# Altium PCB Mixer_Loaded.PCBDOC (part 2 of 2)
Units mil, origin at the board's own origin, x right, y up, seen from the top; angles counter-clockwise.
Board outline 16350 x 11350 mil, 2 copper layers (Top Layer, Bottom Layer); 554 components, 386 nets, 1551 pads, 0 vias.
Unrouted connection lines stored in the file: 1047.
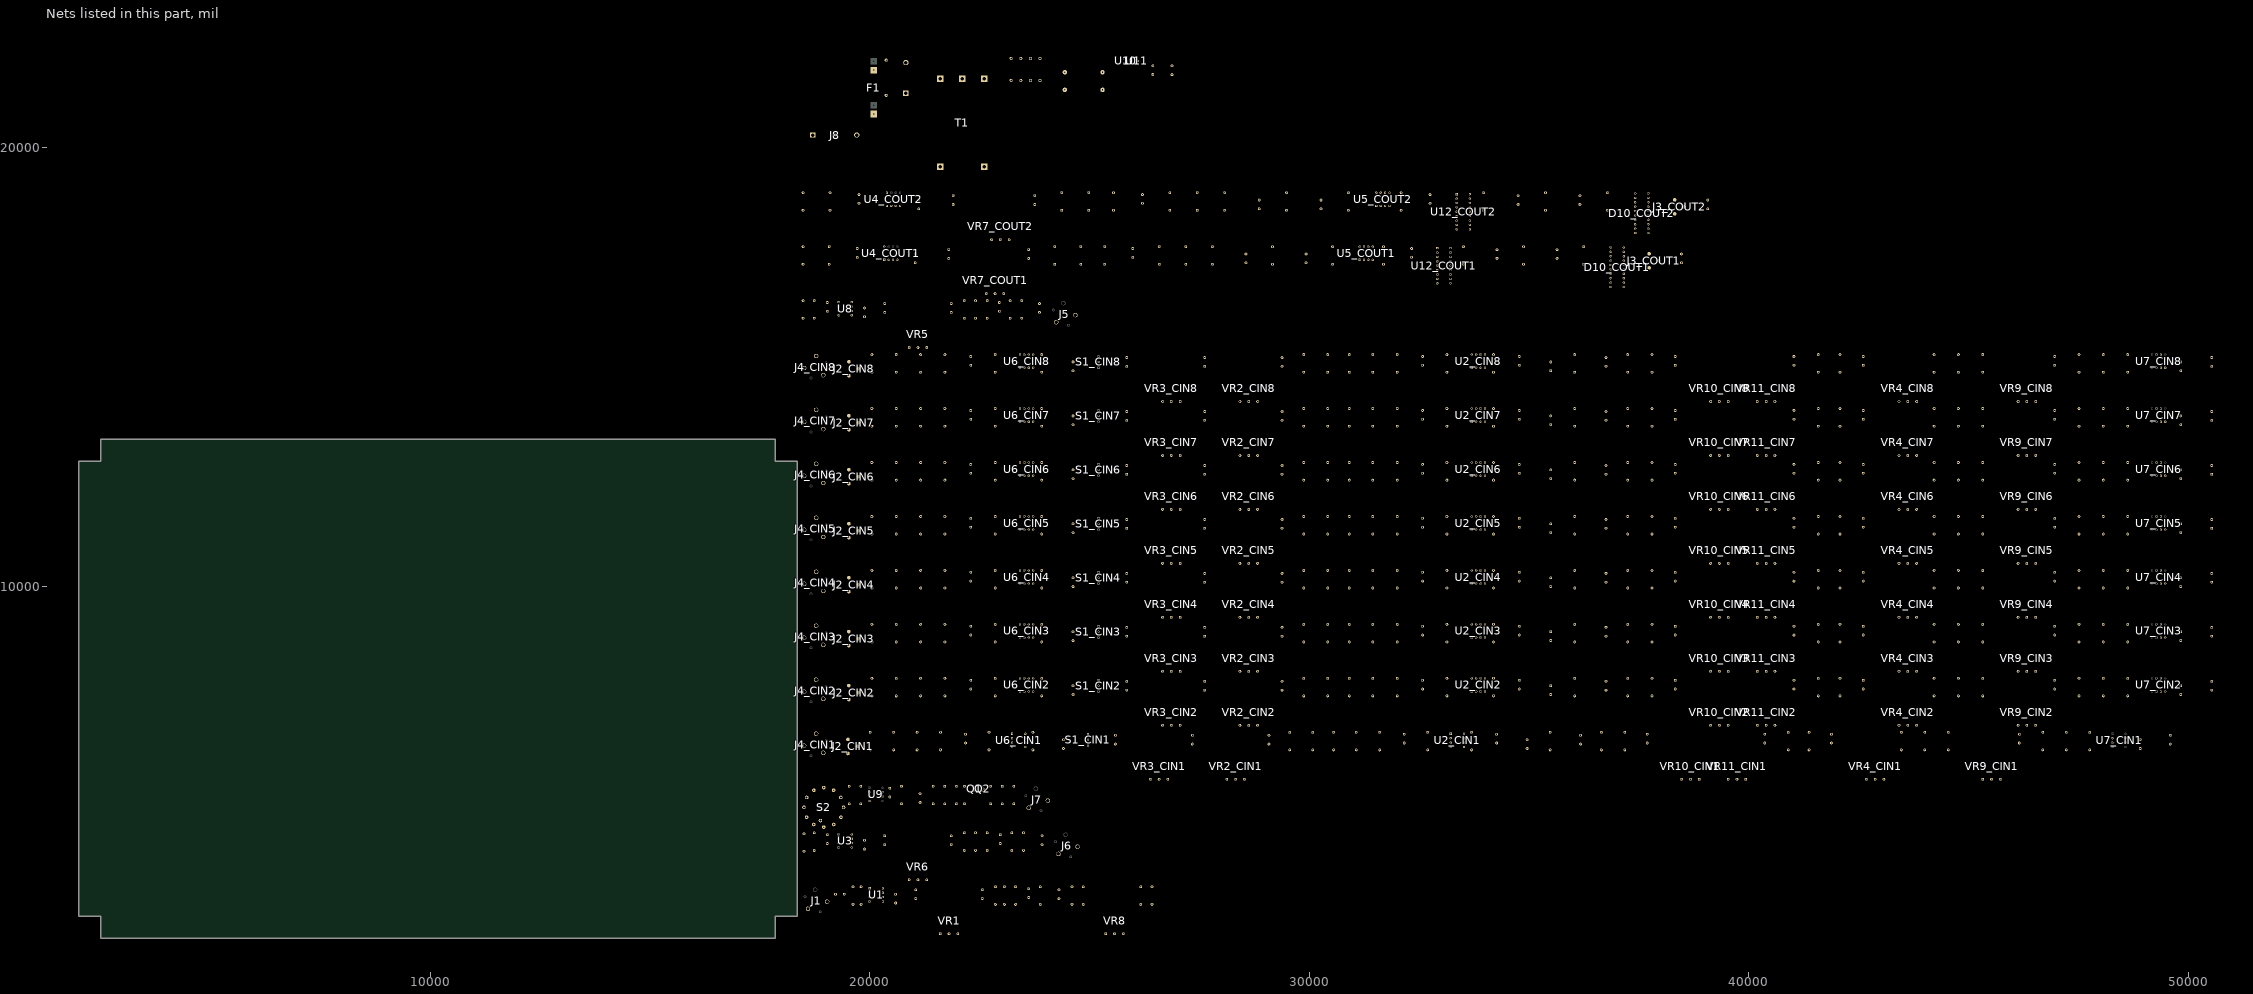
[diagram p2: the nets of this part, all layers, seen from the top]

## Footprints (in the part's own frame and the unit in brackets; to place one, negate y for a bottom-side part, rotate by r counter-clockwise, add the part's x,y. Pads: shape width x height; smd on the part's side, far side on the other; paste and mask are expansions set on the pad) (continued)
FUSE [mil]
  rect 150x150 hole 30: 1(0,0) 1(200,0) 2(1000,0) 2(1200,0)
  Top Layer region: 150,75 50,75 50,-75 150,-75
  Top Layer region: 1150,75 1050,75 1050,-75 1150,-75
  Bottom Layer region: 150,75 50,75 50,-75 150,-75
  Bottom Layer region: 1150,75 1050,75 1050,-75 1150,-75
  silkscreen extent -100,-100 1300,100
IEC-MAINS [mil]
  rect 120x120 hole 80: 1(0,0)
  round 120 hole 80: 2(500,0) 3(1000,0)
  silkscreen extent -250,-250 1250,1750
JACK-6.25MM [mil]
  round 60 hole 39: 0(-251,94) 0(94,-251)
  round 100 hole 78: 1(251,-22) 2(-22,251) 3(-184,-184)
  silkscreen extent -315,-315 315,315
"LED - 10 BAR HORIZONTAL" [mil]
  rect 50x50 hole 32: 1(0,0)
  round 50 hole 32: 2(300,0) 3(0,100) 4(300,100) 5(0,200) 6(300,200) 7(0,300) 8(300,300) 9(0,400) 10(300,400) 11(0,500) 12(300,500) 13(0,600) 14(300,600) 15(0,700) 16(300,700) 17(0,800) 18(300,800) 19(0,900) 20(300,900)
  silkscreen extent -50,-50 350,950
"POT - 24MM" [mil]
  round 62 hole 35: 1(-200,-600) 2(0,-600) 3(200,-600)
  round 50 hole 236.22 unplated: MNT(0,0)
  Keep-Out Layer circle w10: c0,0 r210
  silkscreen extent -500,-670 500,500
RAD0.2 [mil]
  round 62 hole 28: 1(0,0) 2(200,0)
  silkscreen extent -75,-75 275,75
RAD0.8 [mil]
  round 70 hole 40: 1(0,0) 2(800,0)
  silkscreen extent -75,-125 875,125
RB.2/.4 [mil]
  round 62 hole 28: 1(0,0) 2(-200,0)
  silkscreen extent -300,-200 200,200
RB.2/.4-NP [mil]
  round 62 hole 28: 1(0,0) 2(-200,0)
  silkscreen extent -300,-200 100,200
RB.4/.8 [mil]
  round 100 hole 28: 1(0,0) 2(-400,0)
  silkscreen extent -600,-400 350,400
SW-12WAY [mil]
  round 80 hole 40: 1(225,389.71) 2(389.71,225) 3(450,0) 4(389.71,-225) 5(225,-389.71) 6(0,-450) 7(-225,-389.71) 8(-389.71,-225) 9(-450,0) 10(-389.71,225) 11(-225,389.71) 12(0,450) 13(-75,-300)
  silkscreen extent -500,-500 500,500
SW-MAINS [mil]
  rect 120x120 hole 80: 1(0,0)
  round 120 hole 80: 2(700,0)
  silkscreen extent -120,-225 830,225
SW-SPDT [mil]
  rect 50x50 hole 32: 1(0,0)
  round 50 hole 32: 2(130,0) 3(260,0)
  silkscreen extent -70,-75 330,75
TO-92A [mil]
  round 50 hole 30: 1(0,0) 2(50,-50) 3(100,0)
  silkscreen extent -40,-90 140,40
TRANSFORMER [mil]
  rect 150x150 hole 80: 1(0,0) 2(0,1000) 3(2000,1000) 4(2000,500) 5(2000,0)
  silkscreen extent -500,-500 2500,1500
XLR-FEMALE [mm]
  round 2.032 smd: 1(-4.05,0.8) 2(4.05,0.8) 3(0,-4.7)
  silkscreen extent -9,-9 9,9
XLR-MALE [mm]
  round 2.032 smd: 1(4.05,0.8) 2(-4.05,0.8) 3(0,-4.7)
  silkscreen extent -9,-9 9,9

## Part data
C1 C2 C3 C4 C5 C6 C7_CIN1 C7_CIN2 C7_CIN3 C7_CIN4 C7_CIN5 C7_CIN6 C7_CIN7 C7_CIN8 C8_CIN1 C8_CIN2 C8_CIN3 C8_CIN4 C8_CIN5 C8_CIN6 C8_CIN7 C8_CIN8 C9_CIN1 C9_CIN2 C9_CIN3 C9_CIN4 C9_CIN5 C9_CIN6 C9_CIN7 C9_CIN8 C10_CIN1 C10_CIN2 C10_CIN3 C10_CIN4 C10_CIN5 C10_CIN6 C10_CIN7 C10_CIN8 C11 C12 C13_COUT1 C13_COUT2 C14_COUT1 C14_COUT2 C24 C25_CIN1 C25_CIN2 C25_CIN3 C25_CIN4 C25_CIN5 C25_CIN6 C25_CIN7 C25_CIN8 C26_CIN1 C26_CIN2 C26_CIN3 C26_CIN4 C26_CIN5 C26_CIN6 C26_CIN7 C26_CIN8 C27_CIN1 C27_CIN2 C27_CIN3 C27_CIN4 C27_CIN5 C27_CIN6 C27_CIN7 C27_CIN8 C28_COUT1 C28_COUT2 C29_CIN1 C29_CIN2 C29_CIN3 C29_CIN4 C29_CIN5 C29_CIN6 C29_CIN7 C29_CIN8 C30_CIN1 C30_CIN2 C30_CIN3 C30_CIN4 C30_CIN5 C30_CIN6 C30_CIN7 C30_CIN8 C31_CIN1 C31_CIN2 C31_CIN3 C31_CIN4 C31_CIN5 C31_CIN6 C31_CIN7 C31_CIN8 C32_CIN1 C32_CIN2 C32_CIN3 C32_CIN4 C32_CIN5 C32_CIN6 C32_CIN7 C32_CIN8 C33_CIN1 C33_CIN2 C33_CIN3 C33_CIN4 C33_CIN5 C33_CIN6 C33_CIN7 C33_CIN8 C34 C35 C36_COUT1 C36_COUT2 C37 C38 C39_COUT1 C39_COUT2 C40_COUT1 C40_COUT2 C41 C42 C43 C44 C51_COUT1 C51_COUT2: "Capacitor"
C15 C16_CIN1 C16_CIN2 C16_CIN3 C16_CIN4 C16_CIN5 C16_CIN6 C16_CIN7 C16_CIN8 C17_CIN1 C17_CIN2 C17_CIN3 C17_CIN4 C17_CIN5 C17_CIN6 C17_CIN7 C17_CIN8 C18_CIN1 C18_CIN2 C18_CIN3 C18_CIN4 C18_CIN5 C18_CIN6 C18_CIN7 C18_CIN8 C19 C20 C21 C22_COUT1 C22_COUT2 C23_COUT1 C23_COUT2 C45 C46 C47 C48 C49_COUT1 C49_COUT2 C50_COUT1 C50_COUT2: "Bi-Polar Capacitor"
D1 D2 D3 D4 D5 D6: "Diode"
F1: "Fuse"
J2_CIN1 J2_CIN2 J2_CIN3 J2_CIN4 J2_CIN5 J2_CIN6 J2_CIN7 J2_CIN8 J3_COUT1 J3_COUT2: "XLR connector, PCB mounted"
J8: "Connector"
Q1: "NPN BJT"
Q2: "PNP BJT"
R1 R2 R3_CIN1 R3_CIN2 R3_CIN3 R3_CIN4 R3_CIN5 R3_CIN6 R3_CIN7 R3_CIN8 R4_CIN1 R4_CIN2 R4_CIN3 R4_CIN4 R4_CIN5 R4_CIN6 R4_CIN7 R4_CIN8 R5_CIN1 R5_CIN2 R5_CIN3 R5_CIN4 R5_CIN5 R5_CIN6 R5_CIN7 R5_CIN8 R6_CIN1 R6_CIN2 R6_CIN3 R6_CIN4 R6_CIN5 R6_CIN6 R6_CIN7 R6_CIN8 R7 R8_COUT1 R8_COUT2 R9 R10 R11_CIN1 R11_CIN2 R11_CIN3 R11_CIN4 R11_CIN5 R11_CIN6 R11_CIN7 R11_CIN8 R12_CIN1 R12_CIN2 R12_CIN3 R12_CIN4 R12_CIN5 R12_CIN6 R12_CIN7 R12_CIN8 R13 R14 R15_COUT1 R15_COUT2 R16 R17 R18 R19 R20_CIN1 R20_CIN2 R20_CIN3 R20_CIN4 R20_CIN5 R20_CIN6 R20_CIN7 R20_CIN8 R21_CIN1 R21_CIN2 R21_CIN3 R21_CIN4 R21_CIN5 R21_CIN6 R21_CIN7 R21_CIN8 R22_CIN1 R22_CIN2 R22_CIN3 R22_CIN4 R22_CIN5 R22_CIN6 R22_CIN7 R22_CIN8 R23_CIN1 R23_CIN2 R23_CIN3 R23_CIN4 R23_CIN5 R23_CIN6 R23_CIN7 R23_CIN8 R24 R25_CIN1 R25_CIN2 R25_CIN3 R25_CIN4 R25_CIN5 R25_CIN6 R25_CIN7 R25_CIN8 R26_CIN1 R26_CIN2 R26_CIN3 R26_CIN4 R26_CIN5 R26_CIN6 R26_CIN7 R26_CIN8 R27_CIN1 R27_CIN2 R27_CIN3 R27_CIN4 R27_CIN5 R27_CIN6 R27_CIN7 R27_CIN8 R28_CIN1 R28_CIN2 R28_CIN3 R28_CIN4 R28_CIN5 R28_CIN6 R28_CIN7 R28_CIN8 R29 R30 R31 R32 R33 R34 R35 R36 R37_COUT1 R37_COUT2 R38_COUT1 R38_COUT2 R39 R40_CIN1 R40_CIN2 R40_CIN3 R40_CIN4 R40_CIN5 R40_CIN6 R40_CIN7 R40_CIN8 R41_CIN1 R41_CIN2 R41_CIN3 R41_CIN4 R41_CIN5 R41_CIN6 R41_CIN7 R41_CIN8 R42_COUT1 R42_COUT2 R43_CIN1 R43_CIN2 R43_CIN3 R43_CIN4 R43_CIN5 R43_CIN6 R43_CIN7 R43_CIN8 R44_COUT1 R44_COUT2 R45_CIN1 R45_CIN2 R45_CIN3 R45_CIN4 R45_CIN5 R45_CIN6 R45_CIN7 R45_CIN8 R46_CIN1 R46_CIN2 R46_CIN3 R46_CIN4 R46_CIN5 R46_CIN6 R46_CIN7 R46_CIN8 R47_CIN1 R47_CIN2 R47_CIN3 R47_CIN4 R47_CIN5 R47_CIN6 R47_CIN7 R47_CIN8 R48_CIN1 R48_CIN2 R48_CIN3 R48_CIN4 R48_CIN5 R48_CIN6 R48_CIN7 R48_CIN8 R49_CIN1 R49_CIN2 R49_CIN3 R49_CIN4 R49_CIN5 R49_CIN6 R49_CIN7 R49_CIN8 R50_CIN1 R50_CIN2 R50_CIN3 R50_CIN4 R50_CIN5 R50_CIN6 R50_CIN7 R50_CIN8 R51_CIN1 R51_CIN2 R51_CIN3 R51_CIN4 R51_CIN5 R51_CIN6 R51_CIN7 R51_CIN8 R52 R53 R54 R55_COUT1 R55_COUT2 R56_COUT1 R56_COUT2 R57 R58 R59 R60_COUT1 R60_COUT2 R61 R62 R63_COUT1 R63_COUT2 R64_COUT1 R64_COUT2 R65_COUT1 R65_COUT2 R66 R67 R68 R69_COUT1 R69_COUT2 R70_COUT1 R70_COUT2: "Resistor"
T1: "Center-Tapped Transformer"
U1 U2_CIN1 U2_CIN2 U2_CIN3 U2_CIN4 U2_CIN5 U2_CIN6 U2_CIN7 U2_CIN8 U3 U4_COUT1 U4_COUT2 U5_COUT1 U5_COUT2 U8: "Fast Settling Dual Operational Amplifier"
U6_CIN1 U6_CIN2 U6_CIN3 U6_CIN4 U6_CIN5 U6_CIN6 U6_CIN7 U6_CIN8: "Self-Contained Audio Preamplifier"
U7_CIN1 U7_CIN2 U7_CIN3 U7_CIN4 U7_CIN5 U7_CIN6 U7_CIN7 U7_CIN8: "Low Noise, High Speed Precision Operational Amplifier"
U9: "Low-Noise  JFET-Input Operational Amplifiers"
U10 U11: "Very Low Drop Voltage Regulators With Inhibit"
U12_COUT1 U12_COUT2: "Dot/Bar Display Driver"
VR1 VR2_CIN1 VR2_CIN2 VR2_CIN3 VR2_CIN4 VR2_CIN5 VR2_CIN6 VR2_CIN7 VR2_CIN8 VR3_CIN1 VR3_CIN2 VR3_CIN3 VR3_CIN4 VR3_CIN5 VR3_CIN6 VR3_CIN7 VR3_CIN8 VR4_CIN1 VR4_CIN2 VR4_CIN3 VR4_CIN4 VR4_CIN5 VR4_CIN6 VR4_CIN7 VR4_CIN8 VR5 VR6 VR7_COUT1 VR7_COUT2 VR8 VR9_CIN1 VR9_CIN2 VR9_CIN3 VR9_CIN4 VR9_CIN5 VR9_CIN6 VR9_CIN7 VR9_CIN8 VR10_CIN1 VR10_CIN2 VR10_CIN3 VR10_CIN4 VR10_CIN5 VR10_CIN6 VR10_CIN7 VR10_CIN8 VR11_CIN1 VR11_CIN2 VR11_CIN3 VR11_CIN4 VR11_CIN5 VR11_CIN6 VR11_CIN7 VR11_CIN8: "Potentiometer"

## Nets (pads, with @x,y where several pads share a name; then routed paths per layer and width w, separated by ;. In a path a pad name is that pad's centre, name@x,y a point inside that pad or via, vN(x,y) a via of type N, cw(c..) or ccw(c..) an arc to the next point about the centre after c; other vN are vias at no path point)
+15V: C15.1 C16_CIN1.1 C16_CIN2.1 C16_CIN3.1 C16_CIN4.1 C16_CIN5.1 C16_CIN6.1 C16_CIN7.1 C16_CIN8.1 C17_CIN1.1 C17_CIN2.1 C17_CIN3.1 C17_CIN4.1 C17_CIN5.1 C17_CIN6.1 C17_CIN7.1 C17_CIN8.1 C18_CIN1.1 C18_CIN2.1 C18_CIN3.1 C18_CIN4.1 C18_CIN5.1 C18_CIN6.1 C18_CIN7.1 C18_CIN8.1 C19.1 C20.1 C21.1 C22_COUT1.1 C22_COUT2.1 C23_COUT1.1 C23_COUT2.1 C47.1 C49_COUT1.1 C49_COUT2.1 Q1.1 R53.2 R69_COUT1.1 R69_COUT2.1 U1.4 U2_CIN1.8 U2_CIN2.8 U2_CIN3.8 U2_CIN4.8 U2_CIN5.8 U2_CIN6.8 U2_CIN7.8 U2_CIN8.8 U3.8 U4_COUT1.8 U4_COUT2.8 U5_COUT1.8 U5_COUT2.8 U6_CIN1.7 U6_CIN2.7 U6_CIN3.7 U6_CIN4.7 U6_CIN5.7 U6_CIN6.7 U6_CIN7.7 U6_CIN8.7 U7_CIN1.7 U7_CIN2.7 U7_CIN3.7 U7_CIN4.7 U7_CIN5.7 U7_CIN6.7 U7_CIN7.7 U7_CIN8.7 U8.8 U9.7 U10.3 U12_COUT1.3 U12_COUT1.9 U12_COUT2.3 U12_COUT2.9
-15V: C15.2 C16_CIN1.2 C16_CIN2.2 C16_CIN3.2 C16_CIN4.2 C16_CIN5.2 C16_CIN6.2 C16_CIN7.2 C16_CIN8.2 C17_CIN1.2 C17_CIN2.2 C17_CIN3.2 C17_CIN4.2 C17_CIN5.2 C17_CIN6.2 C17_CIN7.2 C17_CIN8.2 C18_CIN1.2 C18_CIN2.2 C18_CIN3.2 C18_CIN4.2 C18_CIN5.2 C18_CIN6.2 C18_CIN7.2 C18_CIN8.2 C19.2 C20.2 C21.2 C22_COUT1.2 C22_COUT2.2 C23_COUT1.2 C23_COUT2.2 C48.2 Q2.1 R54.1 U1.8 U2_CIN1.4 U2_CIN2.4 U2_CIN3.4 U2_CIN4.4 U2_CIN5.4 U2_CIN6.4 U2_CIN7.4 U2_CIN8.4 U3.4 U4_COUT1.4 U4_COUT2.4 U5_COUT1.4 U5_COUT2.4 U6_CIN1.4 U6_CIN2.4 U6_CIN3.4 U6_CIN4.4 U6_CIN5.4 U6_CIN6.4 U6_CIN7.4 U6_CIN8.4 U7_CIN1.4 U7_CIN2.4 U7_CIN3.4 U7_CIN4.4 U7_CIN5.4 U7_CIN6.4 U7_CIN7.4 U7_CIN8.4 U8.4 U9.4 U11.1
A_FUSE: C44.2 F1.2@20087,21753 S3.2
A_IN: F1.1@20087,20753 J8.1
A_SWITCH: C44.1 S3.1 T1.1
GND: C45.2 C46.1 C47.2 C48.1 C49_COUT1.2 C49_COUT2.2 C50_COUT1.2 C50_COUT2.2 J1.3 J2_CIN1.1 J2_CIN2.1 J2_CIN3.1 J2_CIN4.1 J2_CIN5.1 J2_CIN6.1 J2_CIN7.1 J2_CIN8.1 J3_COUT1.1 J3_COUT2.1 J4_CIN1.3 J4_CIN2.3 J4_CIN3.3 J4_CIN4.3 J4_CIN5.3 J4_CIN6.3 J4_CIN7.3 J4_CIN8.3 J5.3 J6.3 J7.3 R1.1 R2.1 R3_CIN1.2 R3_CIN2.2 R3_CIN3.2 R3_CIN4.2 R3_CIN5.2 R3_CIN6.2 R3_CIN7.2 R3_CIN8.2 R7.1 R8_COUT1.1 R8_COUT2.1 R24.2 R27_CIN1.1 R27_CIN2.1 R27_CIN3.1 R27_CIN4.1 R27_CIN5.1 R27_CIN6.1 R27_CIN7.1 R27_CIN8.1 R28_CIN1.1 R28_CIN2.1 R28_CIN3.1 R28_CIN4.1 R28_CIN5.1 R28_CIN6.1 R28_CIN7.1 R28_CIN8.1 R30.1 R31.2 R34.1 R35.2 R38_COUT1.2 R38_COUT2.2 R48_CIN1.1 R48_CIN2.1 R48_CIN3.1 R48_CIN4.1 R48_CIN5.1 R48_CIN6.1 R48_CIN7.1 R48_CIN8.1 R49_CIN1.1 R49_CIN2.1 R49_CIN3.1 R49_CIN4.1 R49_CIN5.1 R49_CIN6.1 R49_CIN7.1 R49_CIN8.1 R70_COUT1.1 R70_COUT2.1 T1.4 U3.3 U4_COUT1.3 U4_COUT2.3 U5_COUT1.3 U5_COUT2.3 U6_CIN1.5 U6_CIN2.5 U6_CIN3.5 U6_CIN4.5 U6_CIN5.5 U6_CIN6.5 U6_CIN7.5 U6_CIN8.5 U7_CIN1.3 U7_CIN2.3 U7_CIN3.3 U7_CIN4.3 U7_CIN5.3 U7_CIN6.3 U7_CIN7.3 U7_CIN8.3 U8.3 U10.2 U11.3 U12_COUT1.2 U12_COUT1.4 U12_COUT2.2 U12_COUT2.4 VR1.3 VR2_CIN1.3 VR2_CIN2.3 VR2_CIN3.3 VR2_CIN4.3 VR2_CIN5.3 VR2_CIN6.3 VR2_CIN7.3 VR2_CIN8.3 VR3_CIN1.3 VR3_CIN2.3 VR3_CIN3.3 VR3_CIN4.3 VR3_CIN5.3 VR3_CIN6.3 VR3_CIN7.3 VR3_CIN8.3 VR4_CIN1.3 VR4_CIN2.3 VR4_CIN3.3 VR4_CIN4.3 VR4_CIN5.3 VR4_CIN6.3 VR4_CIN7.3 VR4_CIN8.3 VR5.3 VR6.3 VR7_COUT1.3 VR7_COUT2.3 VR8.2 VR9_CIN1.2 VR9_CIN2.2 VR9_CIN3.2 VR9_CIN4.2 VR9_CIN5.2 VR9_CIN6.2 VR9_CIN7.2 VR9_CIN8.2
HEADPHONE1: R51_CIN1.2 S2.8
HEADPHONE2: R51_CIN2.2 S2.7
HEADPHONE3: R51_CIN3.2 S2.6
HEADPHONE4: R51_CIN4.2 S2.5
HEADPHONE5: R51_CIN5.2 S2.4
HEADPHONE6: R51_CIN6.2 S2.3
HEADPHONE7: R51_CIN7.2 S2.2
HEADPHONE8: R51_CIN8.2 S2.1
MB1: R17.2 R22_CIN1.2 R22_CIN2.2 R22_CIN3.2 R22_CIN4.2 R22_CIN5.2 R22_CIN6.2 R22_CIN7.2 R22_CIN8.2 R37_COUT1.1 S2.11
MB2: R19.2 R23_CIN1.2 R23_CIN2.2 R23_CIN3.2 R23_CIN4.2 R23_CIN5.2 R23_CIN6.2 R23_CIN7.2 R23_CIN8.2 R37_COUT2.1 S2.12
NetC1_1: C1.1 J1.1
NetC1_2: C1.2 R1.2 R9.1
NetC2_1: C2.1 VR1.2
NetC2_2: C2.2 R2.2 R10.1
NetC3_1: C3.1 VR5.2
NetC3_2: C3.2 R13.1
NetC4_1: C4.1 VR6.2
NetC4_2: C4.2 R14.1
NetC5_1: C5.1 U1.1 U1.2
NetC5_2: C5.2 VR1.1
NetC6_1: C6.1 C24.2 R39.1 U1.7
NetC6_2: C6.2 R16.1 R18.1
NetC7_CIN1_1: C7_CIN1.1 VR2_CIN1.2
NetC7_CIN1_2: C7_CIN1.2 R3_CIN1.1 R11_CIN1.1
NetC7_CIN2_1: C7_CIN2.1 VR2_CIN2.2
NetC7_CIN2_2: C7_CIN2.2 R3_CIN2.1 R11_CIN2.1
NetC7_CIN3_1: C7_CIN3.1 VR2_CIN3.2
NetC7_CIN3_2: C7_CIN3.2 R3_CIN3.1 R11_CIN3.1
NetC7_CIN4_1: C7_CIN4.1 VR2_CIN4.2
NetC7_CIN4_2: C7_CIN4.2 R3_CIN4.1 R11_CIN4.1
NetC7_CIN5_1: C7_CIN5.1 VR2_CIN5.2
NetC7_CIN5_2: C7_CIN5.2 R3_CIN5.1 R11_CIN5.1
NetC7_CIN6_1: C7_CIN6.1 VR2_CIN6.2
NetC7_CIN6_2: C7_CIN6.2 R3_CIN6.1 R11_CIN6.1
NetC7_CIN7_1: C7_CIN7.1 VR2_CIN7.2
NetC7_CIN7_2: C7_CIN7.2 R3_CIN7.1 R11_CIN7.1
NetC7_CIN8_1: C7_CIN8.1 VR2_CIN8.2
NetC7_CIN8_2: C7_CIN8.2 R3_CIN8.1 R11_CIN8.1
NetC8_CIN1_1: C8_CIN1.1 C26_CIN1.2 R40_CIN1.2 U2_CIN1.1
NetC8_CIN1_2: C8_CIN1.2 R4_CIN1.1 R46_CIN1.2
NetC8_CIN2_1: C8_CIN2.1 C26_CIN2.2 R40_CIN2.2 U2_CIN2.1
NetC8_CIN2_2: C8_CIN2.2 R4_CIN2.1 R46_CIN2.2
NetC8_CIN3_1: C8_CIN3.1 C26_CIN3.2 R40_CIN3.2 U2_CIN3.1
NetC8_CIN3_2: C8_CIN3.2 R4_CIN3.1 R46_CIN3.2
NetC8_CIN4_1: C8_CIN4.1 C26_CIN4.2 R40_CIN4.2 U2_CIN4.1
NetC8_CIN4_2: C8_CIN4.2 R4_CIN4.1 R46_CIN4.2
NetC8_CIN5_1: C8_CIN5.1 C26_CIN5.2 R40_CIN5.2 U2_CIN5.1
NetC8_CIN5_2: C8_CIN5.2 R4_CIN5.1 R46_CIN5.2
NetC8_CIN6_1: C8_CIN6.1 C26_CIN6.2 R40_CIN6.2 U2_CIN6.1
NetC8_CIN6_2: C8_CIN6.2 R4_CIN6.1 R46_CIN6.2
NetC8_CIN7_1: C8_CIN7.1 C26_CIN7.2 R40_CIN7.2 U2_CIN7.1
NetC8_CIN7_2: C8_CIN7.2 R4_CIN7.1 R46_CIN7.2
NetC8_CIN8_1: C8_CIN8.1 C26_CIN8.2 R40_CIN8.2 U2_CIN8.1
NetC8_CIN8_2: C8_CIN8.2 R4_CIN8.1 R46_CIN8.2
NetC9_CIN1_1: C9_CIN1.1 C33_CIN1.2 R6_CIN1.2 R47_CIN1.2 U7_CIN1.6
NetC9_CIN1_2: C9_CIN1.2 R20_CIN1.1 R21_CIN1.1 R51_CIN1.1 VR4_CIN1.1
NetC9_CIN2_1: C9_CIN2.1 C33_CIN2.2 R6_CIN2.2 R47_CIN2.2 U7_CIN2.6
NetC9_CIN2_2: C9_CIN2.2 R20_CIN2.1 R21_CIN2.1 R51_CIN2.1 VR4_CIN2.1
NetC9_CIN3_1: C9_CIN3.1 C33_CIN3.2 R6_CIN3.2 R47_CIN3.2 U7_CIN3.6
NetC9_CIN3_2: C9_CIN3.2 R20_CIN3.1 R21_CIN3.1 R51_CIN3.1 VR4_CIN3.1
NetC9_CIN4_1: C9_CIN4.1 C33_CIN4.2 R6_CIN4.2 R47_CIN4.2 U7_CIN4.6
NetC9_CIN4_2: C9_CIN4.2 R20_CIN4.1 R21_CIN4.1 R51_CIN4.1 VR4_CIN4.1
NetC9_CIN5_1: C9_CIN5.1 C33_CIN5.2 R6_CIN5.2 R47_CIN5.2 U7_CIN5.6
NetC9_CIN5_2: C9_CIN5.2 R20_CIN5.1 R21_CIN5.1 R51_CIN5.1 VR4_CIN5.1
NetC9_CIN6_1: C9_CIN6.1 C33_CIN6.2 R6_CIN6.2 R47_CIN6.2 U7_CIN6.6
NetC9_CIN6_2: C9_CIN6.2 R20_CIN6.1 R21_CIN6.1 R51_CIN6.1 VR4_CIN6.1
NetC9_CIN7_1: C9_CIN7.1 C33_CIN7.2 R6_CIN7.2 R47_CIN7.2 U7_CIN7.6
NetC9_CIN7_2: C9_CIN7.2 R20_CIN7.1 R21_CIN7.1 R51_CIN7.1 VR4_CIN7.1
NetC9_CIN8_1: C9_CIN8.1 C33_CIN8.2 R6_CIN8.2 R47_CIN8.2 U7_CIN8.6
NetC9_CIN8_2: C9_CIN8.2 R20_CIN8.1 R21_CIN8.1 R51_CIN8.1 VR4_CIN8.1
NetC10_CIN1_1: C10_CIN1.1 VR3_CIN1.2
NetC10_CIN1_2: C10_CIN1.2 R12_CIN1.1
NetC10_CIN2_1: C10_CIN2.1 VR3_CIN2.2
NetC10_CIN2_2: C10_CIN2.2 R12_CIN2.1
NetC10_CIN3_1: C10_CIN3.1 VR3_CIN3.2
NetC10_CIN3_2: C10_CIN3.2 R12_CIN3.1
NetC10_CIN4_1: C10_CIN4.1 VR3_CIN4.2
NetC10_CIN4_2: C10_CIN4.2 R12_CIN4.1
NetC10_CIN5_1: C10_CIN5.1 VR3_CIN5.2
NetC10_CIN5_2: C10_CIN5.2 R12_CIN5.1
NetC10_CIN6_1: C10_CIN6.1 VR3_CIN6.2
NetC10_CIN6_2: C10_CIN6.2 R12_CIN6.1
NetC10_CIN7_1: C10_CIN7.1 VR3_CIN7.2
NetC10_CIN7_2: C10_CIN7.2 R12_CIN7.1
NetC10_CIN8_1: C10_CIN8.1 VR3_CIN8.2
NetC10_CIN8_2: C10_CIN8.2 R12_CIN8.1
NetC11_1: C11.1 C34.2 R57.2 U8.1
NetC11_2: C11.2 VR5.1
NetC12_1: C12.1 C35.2 R58.2 U3.1
NetC12_2: C12.2 VR6.1
NetC13_COUT1_1: C13_COUT1.1 C36_COUT1.2 R60_COUT1.2 U4_COUT1.1
NetC13_COUT1_2: C13_COUT1.2 VR7_COUT1.1
NetC13_COUT2_1: C13_COUT2.1 C36_COUT2.2 R60_COUT2.2 U4_COUT2.1
NetC13_COUT2_2: C13_COUT2.2 VR7_COUT2.1
NetC14_COUT1_1: C14_COUT1.1 VR7_COUT1.2
NetC14_COUT1_2: C14_COUT1.2 R15_COUT1.1
NetC14_COUT2_1: C14_COUT2.1 VR7_COUT2.2
NetC14_COUT2_2: C14_COUT2.2 R15_COUT2.1
NetC24_1: C24.1 R24.1 R39.2 U1.6
NetC25_CIN1_1: C25_CIN1.1 J2_CIN1.2 R25_CIN1.2 R48_CIN1.2 U6_CIN1.2
NetC25_CIN1_2: C25_CIN1.2 J2_CIN1.3 R26_CIN1.2 R49_CIN1.2 U6_CIN1.3
NetC25_CIN2_1: C25_CIN2.1 J2_CIN2.2 R25_CIN2.2 R48_CIN2.2 U6_CIN2.2
NetC25_CIN2_2: C25_CIN2.2 J2_CIN2.3 R26_CIN2.2 R49_CIN2.2 U6_CIN2.3
NetC25_CIN3_1: C25_CIN3.1 J2_CIN3.2 R25_CIN3.2 R48_CIN3.2 U6_CIN3.2
NetC25_CIN3_2: C25_CIN3.2 J2_CIN3.3 R26_CIN3.2 R49_CIN3.2 U6_CIN3.3
NetC25_CIN4_1: C25_CIN4.1 J2_CIN4.2 R25_CIN4.2 R48_CIN4.2 U6_CIN4.2
NetC25_CIN4_2: C25_CIN4.2 J2_CIN4.3 R26_CIN4.2 R49_CIN4.2 U6_CIN4.3
NetC25_CIN5_1: C25_CIN5.1 J2_CIN5.2 R25_CIN5.2 R48_CIN5.2 U6_CIN5.2
NetC25_CIN5_2: C25_CIN5.2 J2_CIN5.3 R26_CIN5.2 R49_CIN5.2 U6_CIN5.3
NetC25_CIN6_1: C25_CIN6.1 J2_CIN6.2 R25_CIN6.2 R48_CIN6.2 U6_CIN6.2
NetC25_CIN6_2: C25_CIN6.2 J2_CIN6.3 R26_CIN6.2 R49_CIN6.2 U6_CIN6.3
NetC25_CIN7_1: C25_CIN7.1 J2_CIN7.2 R25_CIN7.2 R48_CIN7.2 U6_CIN7.2
NetC25_CIN7_2: C25_CIN7.2 J2_CIN7.3 R26_CIN7.2 R49_CIN7.2 U6_CIN7.3
NetC25_CIN8_1: C25_CIN8.1 J2_CIN8.2 R25_CIN8.2 R48_CIN8.2 U6_CIN8.2
NetC25_CIN8_2: C25_CIN8.2 J2_CIN8.3 R26_CIN8.2 R49_CIN8.2 U6_CIN8.3
NetC26_CIN1_1: C26_CIN1.1 R27_CIN1.2 R40_CIN1.1 U2_CIN1.2
NetC26_CIN2_1: C26_CIN2.1 R27_CIN2.2 R40_CIN2.1 U2_CIN2.2
NetC26_CIN3_1: C26_CIN3.1 R27_CIN3.2 R40_CIN3.1 U2_CIN3.2
NetC26_CIN4_1: C26_CIN4.1 R27_CIN4.2 R40_CIN4.1 U2_CIN4.2
NetC26_CIN5_1: C26_CIN5.1 R27_CIN5.2 R40_CIN5.1 U2_CIN5.2
NetC26_CIN6_1: C26_CIN6.1 R27_CIN6.2 R40_CIN6.1 U2_CIN6.2
NetC26_CIN7_1: C26_CIN7.1 R27_CIN7.2 R40_CIN7.1 U2_CIN7.2
NetC26_CIN8_1: C26_CIN8.1 R27_CIN8.2 R40_CIN8.1 U2_CIN8.2
NetC27_CIN1_1: C27_CIN1.1 R28_CIN1.2 R41_CIN1.1 U2_CIN1.6
NetC27_CIN1_2: C27_CIN1.2 R41_CIN1.2 R50_CIN1.1 U2_CIN1.7
NetC27_CIN2_1: C27_CIN2.1 R28_CIN2.2 R41_CIN2.1 U2_CIN2.6
NetC27_CIN2_2: C27_CIN2.2 R41_CIN2.2 R50_CIN2.1 U2_CIN2.7
NetC27_CIN3_1: C27_CIN3.1 R28_CIN3.2 R41_CIN3.1 U2_CIN3.6
NetC27_CIN3_2: C27_CIN3.2 R41_CIN3.2 R50_CIN3.1 U2_CIN3.7
NetC27_CIN4_1: C27_CIN4.1 R28_CIN4.2 R41_CIN4.1 U2_CIN4.6
NetC27_CIN4_2: C27_CIN4.2 R41_CIN4.2 R50_CIN4.1 U2_CIN4.7
NetC27_CIN5_1: C27_CIN5.1 R28_CIN5.2 R41_CIN5.1 U2_CIN5.6
NetC27_CIN5_2: C27_CIN5.2 R41_CIN5.2 R50_CIN5.1 U2_CIN5.7
NetC27_CIN6_1: C27_CIN6.1 R28_CIN6.2 R41_CIN6.1 U2_CIN6.6
NetC27_CIN6_2: C27_CIN6.2 R41_CIN6.2 R50_CIN6.1 U2_CIN6.7
NetC27_CIN7_1: C27_CIN7.1 R28_CIN7.2 R41_CIN7.1 U2_CIN7.6
NetC27_CIN7_2: C27_CIN7.2 R41_CIN7.2 R50_CIN7.1 U2_CIN7.7
NetC27_CIN8_1: C27_CIN8.1 R28_CIN8.2 R41_CIN8.1 U2_CIN8.6
NetC27_CIN8_2: C27_CIN8.2 R41_CIN8.2 R50_CIN8.1 U2_CIN8.7
NetC28_COUT1_1: C28_COUT1.1 R38_COUT1.1 R42_COUT1.2 U5_COUT1.6
NetC28_COUT1_2: C28_COUT1.2 C39_COUT1.1 R42_COUT1.1 R55_COUT1.2 R63_COUT1.2 R64_COUT1.1
NetC28_COUT2_1: C28_COUT2.1 R38_COUT2.1 R42_COUT2.2 U5_COUT2.6
NetC28_COUT2_2: C28_COUT2.2 C39_COUT2.1 R42_COUT2.1 R55_COUT2.2 R63_COUT2.2 R64_COUT2.1
NetC29_CIN1_1: C29_CIN1.1 R4_CIN1.2 VR10_CIN1.3
NetC29_CIN1_2: C29_CIN1.2 R6_CIN1.1 VR10_CIN1.1
NetC29_CIN2_1: C29_CIN2.1 R4_CIN2.2 VR10_CIN2.3
NetC29_CIN2_2: C29_CIN2.2 R6_CIN2.1 VR10_CIN2.1
NetC29_CIN3_1: C29_CIN3.1 R4_CIN3.2 VR10_CIN3.3
NetC29_CIN3_2: C29_CIN3.2 R6_CIN3.1 VR10_CIN3.1
NetC29_CIN4_1: C29_CIN4.1 R4_CIN4.2 VR10_CIN4.3
NetC29_CIN4_2: C29_CIN4.2 R6_CIN4.1 VR10_CIN4.1
NetC29_CIN5_1: C29_CIN5.1 R4_CIN5.2 VR10_CIN5.3
NetC29_CIN5_2: C29_CIN5.2 R6_CIN5.1 VR10_CIN5.1
NetC29_CIN6_1: C29_CIN6.1 R4_CIN6.2 VR10_CIN6.3
NetC29_CIN6_2: C29_CIN6.2 R6_CIN6.1 VR10_CIN6.1
NetC29_CIN7_1: C29_CIN7.1 R4_CIN7.2 VR10_CIN7.3
NetC29_CIN7_2: C29_CIN7.2 R6_CIN7.1 VR10_CIN7.1
NetC29_CIN8_1: C29_CIN8.1 R4_CIN8.2 VR10_CIN8.3
NetC29_CIN8_2: C29_CIN8.2 R6_CIN8.1 VR10_CIN8.1
NetC30_CIN1_1: C30_CIN1.1 U6_CIN1.6
NetC30_CIN1_2: C30_CIN1.2 VR2_CIN1.1 VR3_CIN1.1
NetC30_CIN2_1: C30_CIN2.1 U6_CIN2.6
NetC30_CIN2_2: C30_CIN2.2 VR2_CIN2.1 VR3_CIN2.1
NetC30_CIN3_1: C30_CIN3.1 U6_CIN3.6
NetC30_CIN3_2: C30_CIN3.2 VR2_CIN3.1 VR3_CIN3.1
NetC30_CIN4_1: C30_CIN4.1 U6_CIN4.6
NetC30_CIN4_2: C30_CIN4.2 VR2_CIN4.1 VR3_CIN4.1
NetC30_CIN5_1: C30_CIN5.1 U6_CIN5.6
NetC30_CIN5_2: C30_CIN5.2 VR2_CIN5.1 VR3_CIN5.1
NetC30_CIN6_1: C30_CIN6.1 U6_CIN6.6
NetC30_CIN6_2: C30_CIN6.2 VR2_CIN6.1 VR3_CIN6.1
NetC30_CIN7_1: C30_CIN7.1 U6_CIN7.6
NetC30_CIN7_2: C30_CIN7.2 VR2_CIN7.1 VR3_CIN7.1
NetC30_CIN8_1: C30_CIN8.1 U6_CIN8.6
NetC30_CIN8_2: C30_CIN8.2 VR2_CIN8.1 VR3_CIN8.1
NetC31_CIN1_1: C31_CIN1.1 R46_CIN1.1
NetC31_CIN1_2: C31_CIN1.2 VR11_CIN1.1
NetC31_CIN2_1: C31_CIN2.1 R46_CIN2.1
NetC31_CIN2_2: C31_CIN2.2 VR11_CIN2.1
NetC31_CIN3_1: C31_CIN3.1 R46_CIN3.1
NetC31_CIN3_2: C31_CIN3.2 VR11_CIN3.1
NetC31_CIN4_1: C31_CIN4.1 R46_CIN4.1
NetC31_CIN4_2: C31_CIN4.2 VR11_CIN4.1
NetC31_CIN5_1: C31_CIN5.1 R46_CIN5.1
NetC31_CIN5_2: C31_CIN5.2 VR11_CIN5.1
NetC31_CIN6_1: C31_CIN6.1 R46_CIN6.1
NetC31_CIN6_2: C31_CIN6.2 VR11_CIN6.1
NetC31_CIN7_1: C31_CIN7.1 R46_CIN7.1
NetC31_CIN7_2: C31_CIN7.2 VR11_CIN7.1
NetC31_CIN8_1: C31_CIN8.1 R46_CIN8.1
NetC31_CIN8_2: C31_CIN8.2 VR11_CIN8.1
NetC32_CIN1_1: C32_CIN1.1 VR11_CIN1.3
NetC32_CIN1_2: C32_CIN1.2 R47_CIN1.1
NetC32_CIN2_1: C32_CIN2.1 VR11_CIN2.3
NetC32_CIN2_2: C32_CIN2.2 R47_CIN2.1
NetC32_CIN3_1: C32_CIN3.1 VR11_CIN3.3
NetC32_CIN3_2: C32_CIN3.2 R47_CIN3.1
NetC32_CIN4_1: C32_CIN4.1 VR11_CIN4.3
NetC32_CIN4_2: C32_CIN4.2 R47_CIN4.1
NetC32_CIN5_1: C32_CIN5.1 VR11_CIN5.3
NetC32_CIN5_2: C32_CIN5.2 R47_CIN5.1
NetC32_CIN6_1: C32_CIN6.1 VR11_CIN6.3
NetC32_CIN6_2: C32_CIN6.2 R47_CIN6.1
NetC32_CIN7_1: C32_CIN7.1 VR11_CIN7.3
NetC32_CIN7_2: C32_CIN7.2 R47_CIN7.1
NetC32_CIN8_1: C32_CIN8.1 VR11_CIN8.3
NetC32_CIN8_2: C32_CIN8.2 R47_CIN8.1
NetC33_CIN1_1: C33_CIN1.1 R5_CIN1.1 U7_CIN1.2 VR11_CIN1.2
NetC33_CIN2_1: C33_CIN2.1 R5_CIN2.1 U7_CIN2.2 VR11_CIN2.2
NetC33_CIN3_1: C33_CIN3.1 R5_CIN3.1 U7_CIN3.2 VR11_CIN3.2
NetC33_CIN4_1: C33_CIN4.1 R5_CIN4.1 U7_CIN4.2 VR11_CIN4.2
NetC33_CIN5_1: C33_CIN5.1 R5_CIN5.1 U7_CIN5.2 VR11_CIN5.2
NetC33_CIN6_1: C33_CIN6.1 R5_CIN6.1 U7_CIN6.2 VR11_CIN6.2
NetC33_CIN7_1: C33_CIN7.1 R5_CIN7.1 U7_CIN7.2 VR11_CIN7.2
NetC33_CIN8_1: C33_CIN8.1 R5_CIN8.1 U7_CIN8.2 VR11_CIN8.2
NetC34_1: C34.1 R29.2 R57.1 U8.2
NetC35_1: C35.1 R33.2 R58.1 U3.2
NetC36_COUT1_1: C36_COUT1.1 R37_COUT1.2 R60_COUT1.1 U4_COUT1.2
NetC36_COUT2_1: C36_COUT2.1 R37_COUT2.2 R60_COUT2.1 U4_COUT2.2
NetC37_1: C37.1 C41.2 R32.1 R61.2
NetC37_2: C37.2 J5.1
NetC38_1: C38.1 C42.2 R36.1 R62.2
NetC38_2: C38.2 J6.1
NetC39_COUT1_2: C39_COUT1.2 J3_COUT1.2
NetC39_COUT2_2: C39_COUT2.2 J3_COUT2.2
NetC40_COUT1_1: C40_COUT1.1 C51_COUT1.2 R56_COUT1.1 R65_COUT1.2
NetC40_COUT1_2: C40_COUT1.2 J3_COUT1.3
NetC40_COUT2_1: C40_COUT2.1 C51_COUT2.2 R56_COUT2.1 R65_COUT2.2
NetC40_COUT2_2: C40_COUT2.2 J3_COUT2.3
NetC41_1: C41.1 R31.1 R32.2 U8.5
NetC42_1: C42.1 R35.1 R36.2 U3.6
NetC43_1: C43.1 R52.2 R59.1 U9.2
NetC43_2: C43.2 R59.2 R66.1 R67.2 R68.1
NetC45_1: C45.1 D4.2 D6.2 U10.1
NetC46_2: C46.2 D3.1 D5.1 U11.2
NetC50_COUT1_1: C50_COUT1.1 D10_COUT1.2 D10_COUT1.4 D10_COUT1.6 D10_COUT1.8 D10_COUT1.10 D10_COUT1.12 D10_COUT1.14 D10_COUT1.16 D10_COUT1.18 D10_COUT1.20 R69_COUT1.2
NetC50_COUT2_1: C50_COUT2.1 D10_COUT2.2 D10_COUT2.4 D10_COUT2.6 D10_COUT2.8 D10_COUT2.10 D10_COUT2.12 D10_COUT2.14 D10_COUT2.16 D10_COUT2.18 D10_COUT2.20 R69_COUT2.2
NetC51_COUT1_1: C51_COUT1.1 R55_COUT1.1 R56_COUT1.2 U5_COUT1.2
NetC51_COUT2_1: C51_COUT2.1 R55_COUT2.1 R56_COUT2.2 U5_COUT2.2
NetD1_1: D1.1 Q1.2 R53.1
NetD1_2: D1.2 D2.1 U9.6
NetD2_2: D2.2 Q2.2 R54.2
NetD3_2: D3.2 D4.1 T1.3
NetD5_2: D5.2 D6.1 T1.5
NetD10_COUT1_1: D10_COUT1.1 U12_COUT1.1
NetD10_COUT1_3: D10_COUT1.3 U12_COUT1.18
NetD10_COUT1_5: D10_COUT1.5 U12_COUT1.17
NetD10_COUT1_7: D10_COUT1.7 U12_COUT1.16
NetD10_COUT1_9: D10_COUT1.9 U12_COUT1.15
NetD10_COUT1_11: D10_COUT1.11 U12_COUT1.14
NetD10_COUT1_13: D10_COUT1.13 U12_COUT1.13
NetD10_COUT1_15: D10_COUT1.15 U12_COUT1.12
NetD10_COUT1_17: D10_COUT1.17 U12_COUT1.11
NetD10_COUT1_19: D10_COUT1.19 U12_COUT1.10
NetD10_COUT2_1: D10_COUT2.1 U12_COUT2.1
NetD10_COUT2_3: D10_COUT2.3 U12_COUT2.18
NetD10_COUT2_5: D10_COUT2.5 U12_COUT2.17
NetD10_COUT2_7: D10_COUT2.7 U12_COUT2.16
NetD10_COUT2_9: D10_COUT2.9 U12_COUT2.15
NetD10_COUT2_11: D10_COUT2.11 U12_COUT2.14
NetD10_COUT2_13: D10_COUT2.13 U12_COUT2.13
NetD10_COUT2_15: D10_COUT2.15 U12_COUT2.12
NetD10_COUT2_17: D10_COUT2.17 U12_COUT2.11
NetD10_COUT2_19: D10_COUT2.19 U12_COUT2.10
NetJ4_CIN1_1: J4_CIN1.1 R25_CIN1.1
NetJ4_CIN1_2: J4_CIN1.2 R26_CIN1.1
NetJ4_CIN2_1: J4_CIN2.1 R25_CIN2.1
NetJ4_CIN2_2: J4_CIN2.2 R26_CIN2.1
NetJ4_CIN3_1: J4_CIN3.1 R25_CIN3.1
NetJ4_CIN3_2: J4_CIN3.2 R26_CIN3.1
NetJ4_CIN4_1: J4_CIN4.1 R25_CIN4.1
NetJ4_CIN4_2: J4_CIN4.2 R26_CIN4.1
NetJ4_CIN5_1: J4_CIN5.1 R25_CIN5.1
NetJ4_CIN5_2: J4_CIN5.2 R26_CIN5.1
NetJ4_CIN6_1: J4_CIN6.1 R25_CIN6.1
NetJ4_CIN6_2: J4_CIN6.2 R26_CIN6.1
NetJ4_CIN7_1: J4_CIN7.1 R25_CIN7.1
NetJ4_CIN7_2: J4_CIN7.2 R26_CIN7.1
NetJ4_CIN8_1: J4_CIN8.1 R25_CIN8.1
NetJ4_CIN8_2: J4_CIN8.2 R26_CIN8.1
NetJ7_1: J7.1 R68.2
NetQ1_3: Q1.3 R66.2
NetQ2_3: Q2.3 R67.1
NetR5_CIN1_2: R5_CIN1.2 VR10_CIN1.2
NetR5_CIN2_2: R5_CIN2.2 VR10_CIN2.2
NetR5_CIN3_2: R5_CIN3.2 VR10_CIN3.2
NetR5_CIN4_2: R5_CIN4.2 VR10_CIN4.2
NetR5_CIN5_2: R5_CIN5.2 VR10_CIN5.2
NetR5_CIN6_2: R5_CIN6.2 VR10_CIN6.2
NetR5_CIN7_2: R5_CIN7.2 VR10_CIN7.2
NetR5_CIN8_2: R5_CIN8.2 VR10_CIN8.2
NetR7_2: R7.2 U9.3
NetR8_COUT1_2: R8_COUT1.2 R15_COUT1.2 U5_COUT1.5
NetR8_COUT2_2: R8_COUT2.2 R15_COUT2.2 U5_COUT2.5
NetR9_2: R9.2 U1.3
NetR10_2: R10.2 U1.5
NetR11_CIN1_2: R11_CIN1.2 U2_CIN1.3
NetR11_CIN2_2: R11_CIN2.2 U2_CIN2.3
NetR11_CIN3_2: R11_CIN3.2 U2_CIN3.3
NetR11_CIN4_2: R11_CIN4.2 U2_CIN4.3
NetR11_CIN5_2: R11_CIN5.2 U2_CIN5.3
NetR11_CIN6_2: R11_CIN6.2 U2_CIN6.3
NetR11_CIN7_2: R11_CIN7.2 U2_CIN7.3
NetR11_CIN8_2: R11_CIN8.2 U2_CIN8.3
NetR12_CIN1_2: R12_CIN1.2 U2_CIN1.5
NetR12_CIN2_2: R12_CIN2.2 U2_CIN2.5
NetR12_CIN3_2: R12_CIN3.2 U2_CIN3.5
NetR12_CIN4_2: R12_CIN4.2 U2_CIN4.5
NetR12_CIN5_2: R12_CIN5.2 U2_CIN5.5
NetR12_CIN6_2: R12_CIN6.2 U2_CIN6.5
NetR12_CIN7_2: R12_CIN7.2 U2_CIN7.5
NetR12_CIN8_2: R12_CIN8.2 U2_CIN8.5
NetR13_2: R13.2 R30.2 U8.6
NetR14_2: R14.2 R34.2 U3.5
NetR16_2: R16.2 R17.1 VR8.1
NetR18_2: R18.2 R19.1 VR8.3
NetR20_CIN1_2: R20_CIN1.2 R22_CIN1.1 VR9_CIN1.1
NetR20_CIN2_2: R20_CIN2.2 R22_CIN2.1 VR9_CIN2.1
NetR20_CIN3_2: R20_CIN3.2 R22_CIN3.1 VR9_CIN3.1
NetR20_CIN4_2: R20_CIN4.2 R22_CIN4.1 VR9_CIN4.1
NetR20_CIN5_2: R20_CIN5.2 R22_CIN5.1 VR9_CIN5.1
NetR20_CIN6_2: R20_CIN6.2 R22_CIN6.1 VR9_CIN6.1
NetR20_CIN7_2: R20_CIN7.2 R22_CIN7.1 VR9_CIN7.1
NetR20_CIN8_2: R20_CIN8.2 R22_CIN8.1 VR9_CIN8.1
NetR21_CIN1_2: R21_CIN1.2 R23_CIN1.1 VR9_CIN1.3
NetR21_CIN2_2: R21_CIN2.2 R23_CIN2.1 VR9_CIN2.3
NetR21_CIN3_2: R21_CIN3.2 R23_CIN3.1 VR9_CIN3.3
NetR21_CIN4_2: R21_CIN4.2 R23_CIN4.1 VR9_CIN4.3
NetR21_CIN5_2: R21_CIN5.2 R23_CIN5.1 VR9_CIN5.3
NetR21_CIN6_2: R21_CIN6.2 R23_CIN6.1 VR9_CIN6.3
NetR21_CIN7_2: R21_CIN7.2 R23_CIN7.1 VR9_CIN7.3
NetR21_CIN8_2: R21_CIN8.2 R23_CIN8.1 VR9_CIN8.3
NetR29_1: R29.1 R50_CIN1.2 R50_CIN2.2 R50_CIN3.2 R50_CIN4.2 R50_CIN5.2 R50_CIN6.2 R50_CIN7.2 R50_CIN8.2 S2.9
NetR33_1: R33.1 S2.10 VR4_CIN1.2 VR4_CIN2.2 VR4_CIN3.2 VR4_CIN4.2 VR4_CIN5.2 VR4_CIN6.2 VR4_CIN7.2 VR4_CIN8.2
NetR43_CIN1_1: R43_CIN1.1 R45_CIN1.1 U6_CIN1.8
NetR43_CIN1_2: R43_CIN1.2 S1_CIN1.2
NetR43_CIN2_1: R43_CIN2.1 R45_CIN2.1 U6_CIN2.8
NetR43_CIN2_2: R43_CIN2.2 S1_CIN2.2
NetR43_CIN3_1: R43_CIN3.1 R45_CIN3.1 U6_CIN3.8
NetR43_CIN3_2: R43_CIN3.2 S1_CIN3.2
NetR43_CIN4_1: R43_CIN4.1 R45_CIN4.1 U6_CIN4.8
NetR43_CIN4_2: R43_CIN4.2 S1_CIN4.2
NetR43_CIN5_1: R43_CIN5.1 R45_CIN5.1 U6_CIN5.8
NetR43_CIN5_2: R43_CIN5.2 S1_CIN5.2
NetR43_CIN6_1: R43_CIN6.1 R45_CIN6.1 U6_CIN6.8
NetR43_CIN6_2: R43_CIN6.2 S1_CIN6.2
NetR43_CIN7_1: R43_CIN7.1 R45_CIN7.1 U6_CIN7.8
NetR43_CIN7_2: R43_CIN7.2 S1_CIN7.2
NetR43_CIN8_1: R43_CIN8.1 R45_CIN8.1 U6_CIN8.8
NetR43_CIN8_2: R43_CIN8.2 S1_CIN8.2
NetR44_COUT1_1: R44_COUT1.1 R70_COUT1.2 U12_COUT1.8
NetR44_COUT1_2: R44_COUT1.2 U12_COUT1.6 U12_COUT1.7
NetR44_COUT2_1: R44_COUT2.1 R70_COUT2.2 U12_COUT2.8
NetR44_COUT2_2: R44_COUT2.2 U12_COUT2.6 U12_COUT2.7
NetR45_CIN1_2: R45_CIN1.2 S1_CIN1.3
NetR45_CIN2_2: R45_CIN2.2 S1_CIN2.3
NetR45_CIN3_2: R45_CIN3.2 S1_CIN3.3
NetR45_CIN4_2: R45_CIN4.2 S1_CIN4.3
NetR45_CIN5_2: R45_CIN5.2 S1_CIN5.3
NetR45_CIN6_2: R45_CIN6.2 S1_CIN6.3
NetR45_CIN7_2: R45_CIN7.2 S1_CIN7.3
NetR45_CIN8_2: R45_CIN8.2 S1_CIN8.3
NetR52_1: R52.1 S2.13
NetR61_1: R61.1 U8.7
NetR62_1: R62.1 U3.7
NetR63_COUT1_1: R63_COUT1.1 U5_COUT1.7
NetR63_COUT2_1: R63_COUT2.1 U5_COUT2.7
NetR64_COUT1_2: R64_COUT1.2 U12_COUT1.5
NetR64_COUT2_2: R64_COUT2.2 U12_COUT2.5
NetR65_COUT1_1: R65_COUT1.1 U5_COUT1.1
NetR65_COUT2_1: R65_COUT2.1 U5_COUT2.1
NetS1_CIN1_1: S1_CIN1.1 U6_CIN1.1
NetS1_CIN2_1: S1_CIN2.1 U6_CIN2.1
NetS1_CIN3_1: S1_CIN3.1 U6_CIN3.1
NetS1_CIN4_1: S1_CIN4.1 U6_CIN4.1
NetS1_CIN5_1: S1_CIN5.1 U6_CIN5.1
NetS1_CIN6_1: S1_CIN6.1 U6_CIN6.1
NetS1_CIN7_1: S1_CIN7.1 U6_CIN7.1
NetS1_CIN8_1: S1_CIN8.1 U6_CIN8.1
NEUTRAL: J8.3 T1.2
pads on no net: F1.1@20087,20953 F1.2@20087,21953 J1.0 J1.2 J4_CIN1.0 J4_CIN2.0 J4_CIN3.0 J4_CIN4.0 J4_CIN5.0 J4_CIN6.0 J4_CIN7.0 J4_CIN8.0 J5.0 J5.2 J6.0 J6.2 J7.0 J7.2 J8.2 U4_COUT1.5 U4_COUT1.6 U4_COUT1.7 U4_COUT2.5 U4_COUT2.6 U4_COUT2.7 U7_CIN1.1 U7_CIN1.5 U7_CIN1.8 U7_CIN2.1 U7_CIN2.5 U7_CIN2.8 U7_CIN3.1 U7_CIN3.5 U7_CIN3.8 U7_CIN4.1 U7_CIN4.5 U7_CIN4.8 U7_CIN5.1 U7_CIN5.5 U7_CIN5.8 U7_CIN6.1 U7_CIN6.5 U7_CIN6.8 U7_CIN7.1 U7_CIN7.5 U7_CIN7.8 U7_CIN8.1 U7_CIN8.5 U7_CIN8.8 U9.1 U9.5 U9.8 VR1.MNT VR2_CIN1.MNT VR2_CIN2.MNT VR2_CIN3.MNT VR2_CIN4.MNT VR2_CIN5.MNT VR2_CIN6.MNT VR2_CIN7.MNT VR2_CIN8.MNT VR3_CIN1.MNT VR3_CIN2.MNT VR3_CIN3.MNT VR3_CIN4.MNT VR3_CIN5.MNT VR3_CIN6.MNT VR3_CIN7.MNT VR3_CIN8.MNT VR4_CIN1.MNT VR4_CIN2.MNT VR4_CIN3.MNT VR4_CIN4.MNT VR4_CIN5.MNT VR4_CIN6.MNT VR4_CIN7.MNT VR4_CIN8.MNT VR5.MNT VR6.MNT VR7_COUT1.MNT VR7_COUT2.MNT VR8.MNT VR9_CIN1.MNT VR9_CIN2.MNT VR9_CIN3.MNT VR9_CIN4.MNT VR9_CIN5.MNT VR9_CIN6.MNT VR9_CIN7.MNT VR9_CIN8.MNT VR10_CIN1.MNT VR10_CIN2.MNT VR10_CIN3.MNT VR10_CIN4.MNT VR10_CIN5.MNT VR10_CIN6.MNT VR10_CIN7.MNT VR10_CIN8.MNT VR11_CIN1.MNT VR11_CIN2.MNT VR11_CIN3.MNT VR11_CIN4.MNT VR11_CIN5.MNT VR11_CIN6.MNT VR11_CIN7.MNT VR11_CIN8.MNT

## Keep-outs
Keep-Out Layer:
  the board outline again, w50

## Silkscreen, mask and mechanical layers (free items; w line width, h text height)
Mechanical 16:
  drawing of 1698 lines, arcs and shapes, not listed
  text "1" at 1576.34,15715 h70
  text "2" at 4357,15715 h70
  text "3" at 7136.34,15715 h70
  text "4" at 9933.01,15715 h70
  text "5" at 12716.35,15715 h70
  text "6" at 15507,15715 h70
  text "7" at 18307,15715 h70
  text "8" at 21087,15715 h70
  text "A" at 325,13857 h70
  text "A" at 22325,13857 h70
  text "B" at 325,9927 h70
  text "B" at 22325,9927 h70
  text "C" at 325,6007 h70
  text "C" at 22325,6007 h70
  text "D" at 325,2077 h70
  text "D" at 22325,2077 h70
  text "ENGINEER:" at 17750,1600 h45
  text "TITLE:" at 19250,1600 h45
  text "PCB DESIGNER:" at 17750,1305 h45
  text "n" at 16976,1228 h35
  text "n" at 16976,1228 h35
  text "T" at 16450,1227 h35
  text "T" at 16450,1227 h35
  text "h" at 16495,1227 h35
  text "h" at 16495,1227 h35
  text "i" at 16535.33,1227 h35
  text "i" at 16535.33,1227 h35
  text "n" at 16564,1227 h35
  text "n" at 16564,1227 h35
  text "k" at 16610,1227 h35
  text "k" at 16610,1227 h35
  text "i" at 16670.67,1227 h35
  text "i" at 16670.67,1227 h35
  text "t" at 16696.67,1227 h35
  text "t" at 16696.67,1227 h35
  text "," at 16727.67,1226.67 h35
  text "," at 16727.67,1226.67 h35
  text "D" at 16780,1227 h35
  text "D" at 16780,1227 h35
  text "e" at 16827,1227 h35
  text "e" at 16827,1227 h35
  text "s" at 16868,1227 h35
  text "s" at 16868,1227 h35
  text "i" at 16900.33,1227 h35
  text "i" at 16900.33,1227 h35
  text "g" at 16929,1226.66 h35
  text "g" at 16929,1226.66 h35
  text "i" at 17040.33,1227 h35
  text "i" at 17040.33,1227 h35
  text "t" at 17064.67,1227 h35
  text "t" at 17064.67,1227 h35
  text "," at 17095.67,1226.67 h35
  text "," at 17095.67,1226.67 h35
  text "B" at 17146,1227 h35
  text "B" at 17146,1227 h35
  text "u" at 17194,1227 h35
  text "u" at 17194,1227 h35
  text "i" at 17231.33,1227 h35
  text "i" at 17231.33,1227 h35
  text "l" at 17261,1227 h35
  text "l" at 17261,1227 h35
  text "d" at 17283,1227 h35
  text "d" at 17283,1227 h35
  text "i" at 17347.67,1227 h35
  text "i" at 17347.67,1227 h35
  text "t" at 17373.67,1227 h35
  text "t" at 17373.67,1227 h35
  text "DATE:" at 17750,1000 h45
  text "PART NO.:" at 19250,1000 h45
  text "REV:" at 21350,1000 h45
  text "Altium Limited" at 16450,900 h70
  text ".PRINT_DATE" at 17800,880 h70
  text "12a Rodborough Rd" at 16450,800 h70
  text "Frenchs Forest" at 16450,700 h70
  text "FILE NAME:" at 17750,700 h45
  text "DWG NO:" at 19250,700 h45
  text "SCALE:" at 21350,700 h45
  text "NSW 2086" at 16450,600 h70
  text ".PCB_FILE_NAME_NO_PATH" at 17800,580 h70
  text "1" at 1576.34,325 h70
  text "2" at 4357,325 h70
  text "3" at 7136.34,325 h70
  text "4" at 9933.01,325 h70
  text "5" at 12716.35,325 h70
  text "6" at 15507,325 h70
  text "7" at 18307,325 h70
  text "8" at 21087,325 h70